# Altium PCB RobotArm_HX711_Olav_Nikolai.PcbDoc
Units mil, origin at the board's own origin, x right, y up, seen from the top; angles counter-clockwise.
Board outline 2362.2 x 1181.1 mil, 2 copper layers (Top Layer, Bottom Layer); 34 components, 56 nets, 123 pads, 12 vias.
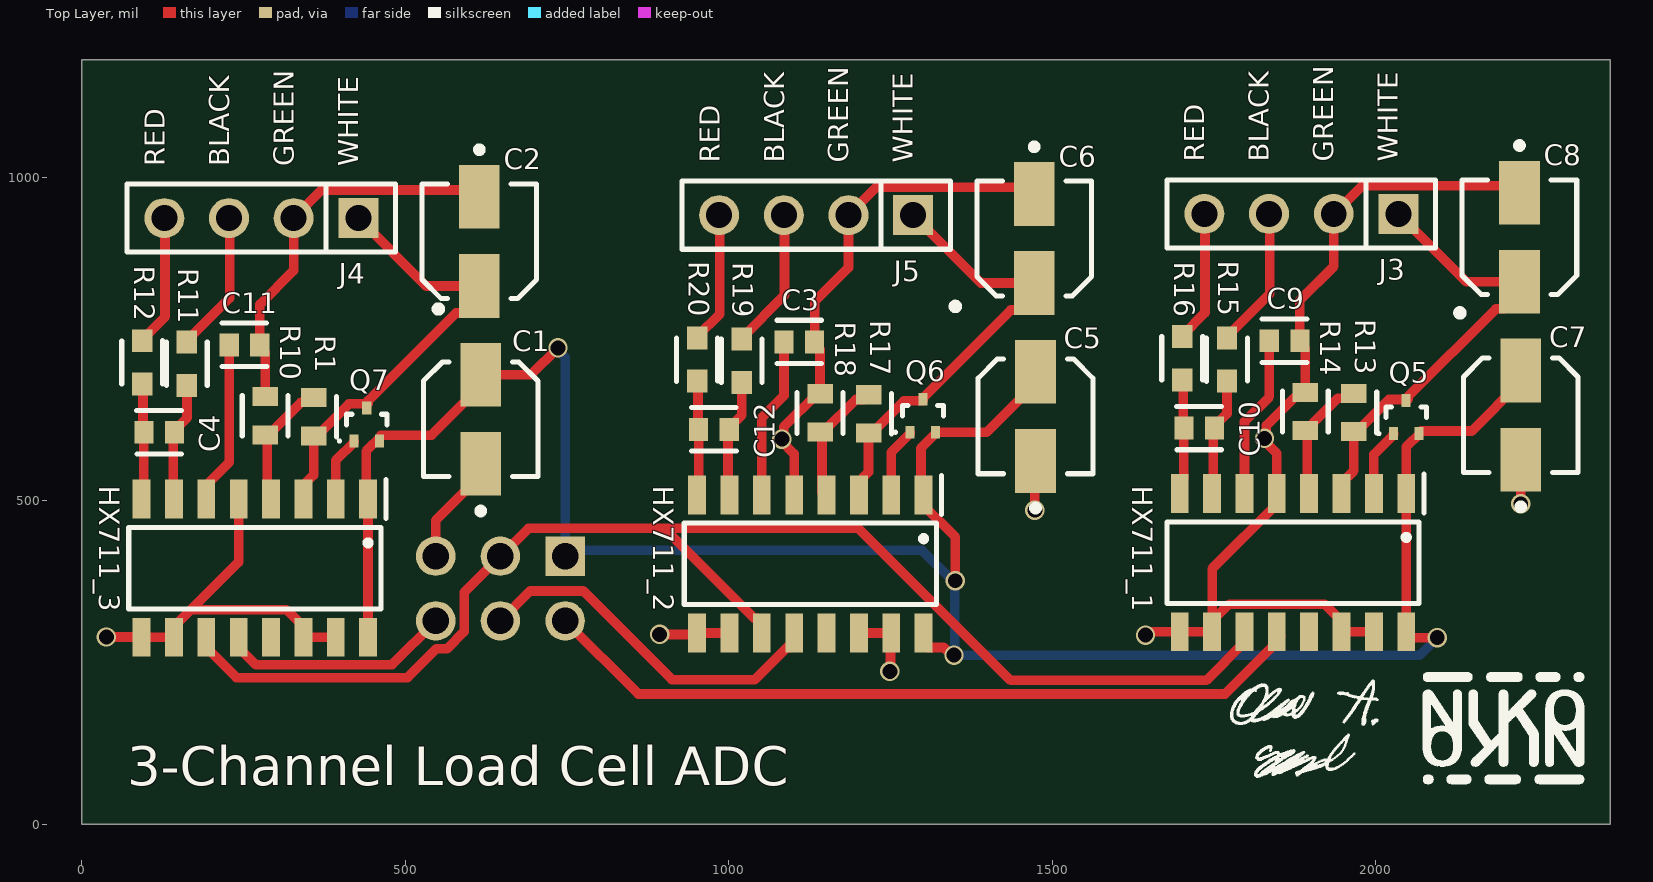
[diagram p0: Top Layer view]
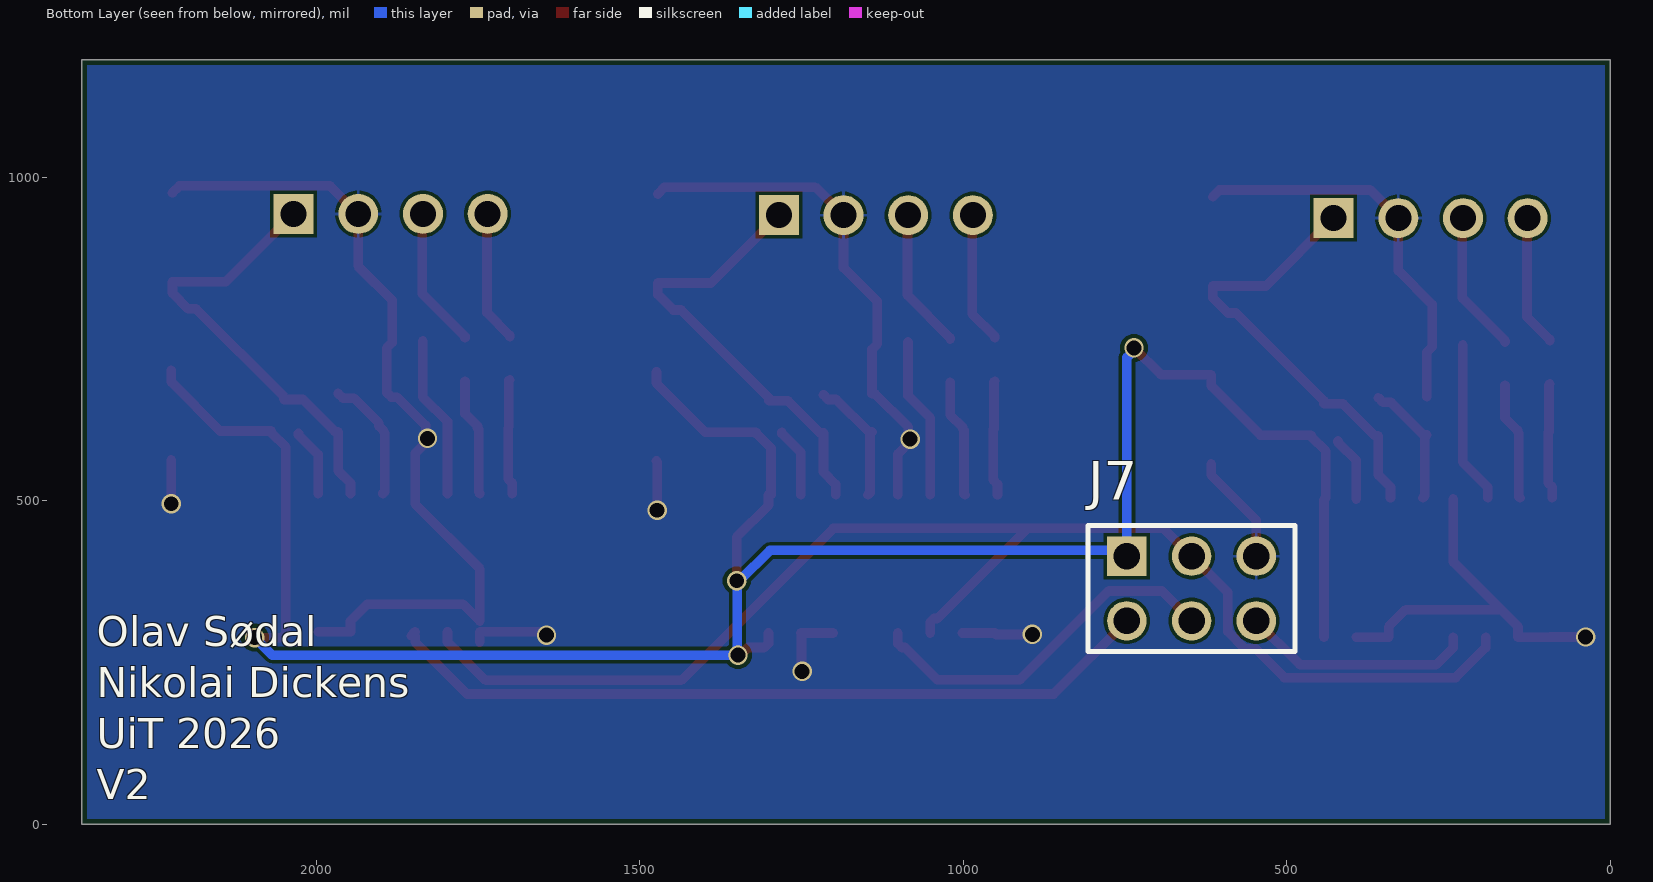
[diagram p1: Bottom Layer view, seen from below]
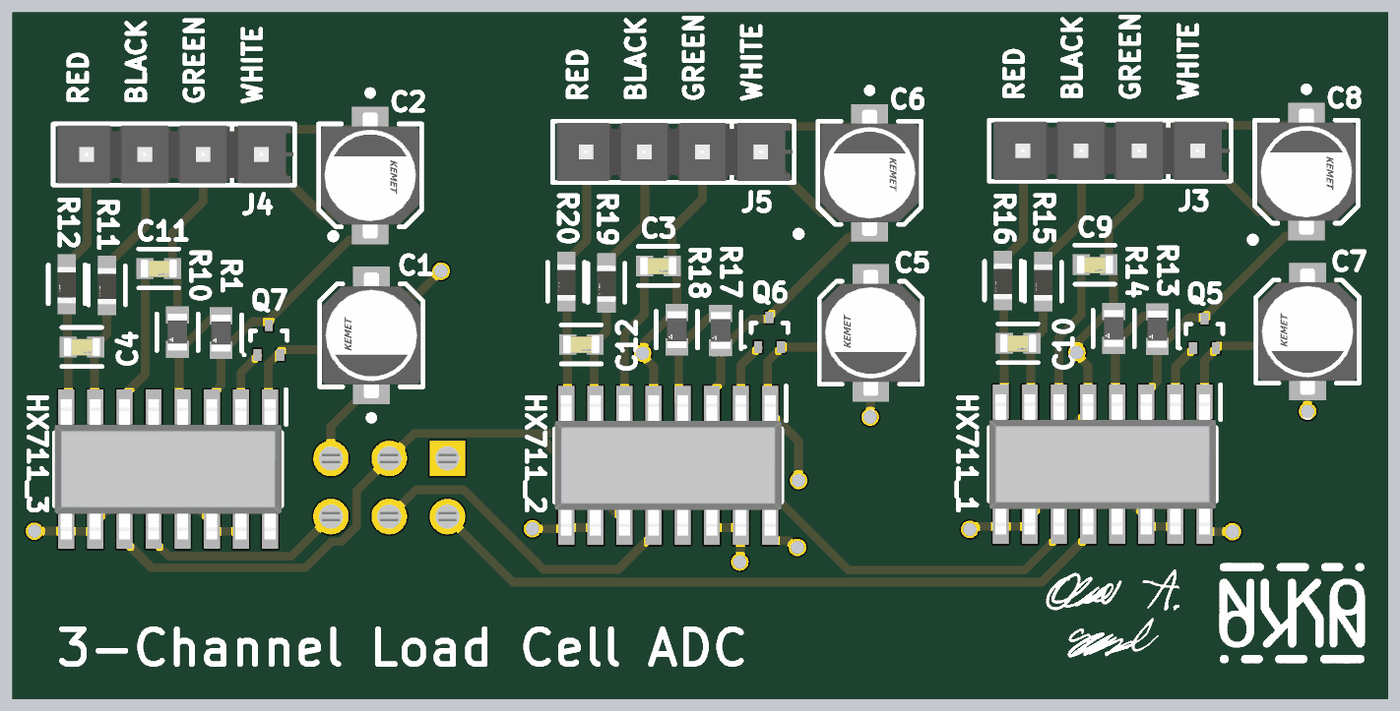
[diagram p2: 3D render of the assembled board from above, using the file's embedded part models]

## Layer stack, top to bottom
Top Solder: solder mask 0.4, Solder Resist, Dk 3.5
Top Layer: signal copper 1.4
Dielectric 1: dielectric 12.6, FR-4, Dk 4.8
Bottom Layer: signal copper 1.4
Bottom Solder: solder mask 0.4, Solder Resist, Dk 3.5

## Board outline
2362.2,0 0,0 0,1181.1 2362.2,1181.1

## Design rules (kind name [scope] priority, off if disabled: settings)
BoardOutlineClearance [All] p1: gap=7.87 ignorepadtopadclearanceinfootprint=FALSE
Clearance [All] p1: gap=5 ignorepadtopadclearanceinfootprint=FALSE except(9.84: Arc-Hole Track-Hole SMDPad-Hole THPad-Hole Via-Hole Fill-Hole Poly-Hole Region-Hole Text-Hole)
ComponentClearance [All] p1: gap=5 collisioncheckmode=3 verticalgap=5 showdistances=TRUE
DiffPairsRouting [All] p1: maxlimit=10 minlimit=5 mostfreqgap=5 toplayer_minwidth=5 toplayer_maxwidth=1000 toplayer_prefwidth=5 bottomlayer_minwidth=5 bottomlayer_maxwidth=1000 bottomlayer_prefwidth=5 maxuncoupledlength=500
Height [All] p1: minheight=0 maxheight=71497.94 prefheight=500
HoleSize [All] p1: absolutevalues=TRUE maxlimit=248.03 minlimit=11.81 maxpercent=80.000 minpercent=20.000
HoleToHoleClearance [All] p1: gap=9.84 allowstackedmicrovias=FALSE
MinimumAnnularRing [All] p1: minimumring=3
MinimumSolderMaskSliver [All] p1: minsoldermaskwidth=0
PlaneClearance [All] p1: clearance=5
PlaneConnect PlaneConnectPowerPads [InPadClass('PowerPads')] p1: planeconnectstyle=Direct reliefexpansion=20 reliefentries=4 reliefconductorwidth=10 reliefairgap=10
PlaneConnect [All] p2: pad.planeconnectstyle=Relief pad.reliefexpansion=11.81 pad.reliefentries=4 pad.reliefconductorwidth=5 pad.reliefairgap=5 via.planeconnectstyle=Direct via.reliefexpansion=11.81 via.reliefentries=4 via.reliefconductorwidth=5 via.reliefairgap=5
PolygonConnect PolygonConnectPowerPads [All vs (InPadClass('PowerPads'))] p1: connectstyle=Direct reliefconductorwidth=10 reliefentries=4 polygonreliefangle="90 Angle" airgapwidth=10
PolygonConnect [All] p2: thpad.connectstyle=Relief thpad.reliefconductorwidth=5 thpad.reliefentries=4 thpad.polygonreliefangle="90 Angle" thpad.airgapwidth=5 smdpad.connectstyle=Relief smdpad.reliefconductorwidth=5 smdpad.reliefentries=4 smdpad.polygonreliefangle="90 Angle" smdpad.airgapwidth=5 via.connectstyle=Direct via.reliefconductorwidth=5 via.reliefentries=4 via.polygonreliefangle="90 Angle" via.airgapwidth=5
RoutingVias [All] p1: holewidth=11.81 width=23.62 viastyle="Through Hole" minholewidth=11.81 minwidth=23.62 maxholewidth=23.62 maxwidth=259.84
SilkToSilkClearance [All] p1: silktosilkclearance=0
SilkToSolderMaskClearance [IsPad] p1: minsilkscreentomaskgap=5 clearancetoexposedcopper=TRUE
SolderMaskExpansion [All] p1: expansion=2.95 istentingtop=FALSE
SupplyNets "Schematic Supply Nets_2" [InNet('12V')] p1: voltage=0.000
SupplyNets "Schematic Supply Nets_1" [InNet('GND')] p2: voltage=0.000
SupplyNets "Schematic Supply Nets_4" [InNet('5V')] p3: voltage=0.000
SupplyNets "Schematic Supply Nets_3" [InNet('3V3')] p4: voltage=0.000
Width [All] p1: maxlimit=1000 minlimit=5 preferedwidth=5 minimp=50.000000 maximp=50.000000 favimp=50.000000
20 further rules are at their usual default settings.

## Classes and differential pairs
component class Main: J7
component class Designator: C1 C2 C3 C4 J4 Q6 R1 R10 R11 R12

## Components (designator, comment, footprint, x,y, rotation, side; value= is the part's Value field where it differs from the comment)
C1 "EDK106M035A9BAA" FP-EDK9B-MFG 616.37,625.54 r90 top value=10uF
C2 "EDK106M035A9BAA" FP-EDK9B-MFG 614.37,900.54 r270 top value=10uF
C3 "C0603C104K3RAC7411" FP-C0603C-CF-MFG 1109,745 r180 top value="0.10 μF"
C4 "C0603C104K3RAC7411" FP-C0603C-CF-MFG 119.37,605.54 r180 top value="0.10 μF"
C5 "EDK106M035A9BAA" FP-EDK9B-MFG 1474,630 r90 top value=10uF
C6 "EDK106M035A9BAA" FP-EDK9B-MFG 1472,905 r270 top value=10uF
C7 "EDK106M035A9BAA" FP-EDK9B-MFG 2224,632 r90 top value=10uF
C8 "EDK106M035A9BAA" FP-EDK9B-MFG 2222,907 r270 top value=10uF
C9 "C0603C104K3RAC7411" FP-C0603C-CF-MFG 1859,747 r180 top value="0.10 μF"
C10 "C0603C104K3RAC7411" FP-C0603C-CF-MFG 1727,612 r180 top value="0.10 μF"
C11 "C0603C104K3RAC7411" FP-C0603C-CF-MFG 251.37,740.54 r180 top value="0.10 μF"
C12 "C0603C104K3RAC7411" FP-C0603C-CF-MFG 977,610 r180 top value="0.10 μF"
HX711_1 "HX711" SOIC127P600X160-16N 1872,404 r270 top
HX711_2 "HX711" SOIC127P600X160-16N 1126,402 r270 top (schematic designator HC711_3)
HX711_3 "HX711" SOIC127P600X160-16N 267.37,395.54 r270 top (schematic designator HX711_2)
J3 "TSW-104-23-T-S" FP-TSW-104-23-T-S-MFG 1885,943 r180 top
J4 "TSW-104-23-T-S" FP-TSW-104-23-T-S-MFG 277.37,936.54 r180 top
J5 "TSW-104-23-T-S" FP-TSW-104-23-T-S-MFG 1135,941 r180 top
J7 "SSW-103-01-L-D" SMTC-SSW-103-01-X-D 747,414 r180 bottom
Q5 "MMBT3906TT1G" ONSC-SC-75-3-463-01_V 2047,629 r90 top
Q6 "MMBT3906TT1G" ONSC-SC-75-3-463-01_V 1300,631 r90 top
Q7 "MMBT3906TT1G" ONSC-SC-75-3-463-01_V 440.37,617.54 r90 top
R1 "CRCW060320K0FKEAHP" FP-CRCW0603-HPe3-MFG 358.37,629.54 r270 top
R10 "CRCW060320K0FKEAHP" FP-CRCW0603-HPe3-MFG 283.37,631.01 r270 top
R11 "RT0603FRE07100RL" FP-RT0603-MFG 162.37,711.54 r270 top value=100Ω
R12 "RT0603FRE07100RL" FP-RT0603-MFG 93.37,713.54 r270 top value=100Ω
R13 "CRCW060320K0FKEAHP" FP-CRCW0603-HPe3-MFG 1966,636 r270 top
R14 "CRCW060320K0FKEAHP" FP-CRCW0603-HPe3-MFG 1891,637.47 r270 top
R15 "RT0603FRE07100RL" FP-RT0603-MFG 1770,718 r270 top value=100Ω
R16 "RT0603FRE07100RL" FP-RT0603-MFG 1701,720 r270 top value=100Ω
R17 "CRCW060320K0FKEAHP" FP-CRCW0603-HPe3-MFG 1216,634 r270 top
R18 "CRCW060320K0FKEAHP" FP-CRCW0603-HPe3-MFG 1141,635.47 r270 top
R19 "RT0603FRE07100RL" FP-RT0603-MFG 1020,716 r270 top value=100Ω
R20 "RT0603FRE07100RL" FP-RT0603-MFG 951,718 r270 top value=100Ω

## Footprints (in the part's own frame and the unit in brackets; to place one, negate y for a bottom-side part, rotate by r counter-clockwise, add the part's x,y. Pads: shape width x height; smd on the part's side, far side on the other; paste and mask are expansions set on the pad)
FP-C0603C-CF-MFG [mm]
  rect 0.75x0.9 smd paste+0 mask+0: 1(-0.6,0) 2(0.6,0)
  silkscreen extent -0.87,-0.85 0.88,0.85, body extent -1.2,-0.6 1.2,0.6, height 0.25
FP-CRCW0603-HPe3-MFG [mm]
  rect 0.75x1 smd paste+0 mask+0: 1(-0.75,0) 2(0.75,0)
  silkscreen extent -0.8,0.9 0.8,0.9, body extent -1.22,-0.6 1.22,0.6, height 0.25
FP-EDK9B-MFG [mm]
  rect 2.5x1.6 smd paste+0 mask+0: 1(-1.75,0) 2(1.75,0)
  silkscreen extent -3.72,-2.25 2.25,2.25, body extent -3.25,-2.5 3.25,2.5, height 0.25
FP-RT0603-MFG [mm]
  rect 0.9x0.8 smd paste+0 mask+0: 1(-0.85,0) 2(0.85,0)
  silkscreen extent -0.85,-0.81 0.86,0.8, body extent -1.4,-0.55 1.4,0.55, height 0.25
FP-TSW-104-23-T-S-MFG [mm]
  rect 1.57x1.57 hole 1.02 paste-2539.97 mask+0: 1(-3.81,0)
  round 1.57 hole 1.02 paste-2539.97 mask+0: 2(-1.27,0) 3(1.27,0) 4(3.81,0)
  silkscreen extent -5.27,-1.34 5.27,1.34, body extent -5.37,-1.44 5.37,1.44, height 0.25
ONSC-SC-75-3-463-01_V [mil] "SOT23, 3-Leads, Body 1.6x0.8mm, Pitch 0.5mm"
  rect 20x14.02 smd: 1(-25.49,19.68) 2(-25.49,-19.69) 3(25.49,0)
  silkscreen extent -27,-31 16,44, body extent -16,-31 16,31, height 35
SMTC-SSW-103-01-X-D [mm] "SQ Post Socket, 2x3 Pins, Vertical, 2.54mm Pitch, Female"
  rect 1.55x1.55 hole 1.04: 1(0,0)
  round 1.55 hole 1.04: 2(0,-2.54) 3(2.54,0) 4(2.54,-2.54) 5(5.08,0) 6(5.08,-2.54)
  silkscreen extent -1.53,-3.74 6.61,1.2, body extent -1.52,-3.75 6.6,1.21, height 8.51
SOIC127P600X160-16N [mm]
  rect 1.525x0.7 smd: 1(-2.712,4.445) 2(-2.712,3.175) 3(-2.712,1.905) 4(-2.712,0.635) 5(-2.712,-0.635) 6(-2.712,-1.905) 7(-2.712,-3.175) 8(-2.712,-4.445) 9(2.712,-4.445) 10(2.712,-3.175) 11(2.712,-1.905) 12(2.712,-0.635) 13(2.712,0.635) 14(2.712,1.905) 15(2.712,3.175) 16(2.712,4.445)
  silkscreen extent -3.47,-4.95 1.6,5.15, body extent -3.06,-4.94 3.06,4.94, height 2.05

## Part data
C1 C2 C5 C6 C7 C8: library part CMP-03015-000003-1, "CAP ALUM 10UF 20% 35V SMD", Capacitance=10uF, Leakage Current=3.5uA, Manufacturer=Kemet, Package=EDK9B, Ripple Current=24mA, Temperature="-40°C to +85°C", Temperature Range High=+85°C, Temperature Range Low=-40°C, Tolerance=20%, Voltage Rating=35V, Automotive=No, Category=Cap, ComponentLink2Description=Datasheet, ComponentLink2URL=https://content.kemet.com/datasheets/KEM_A4001_EDK.pdf, Device Class L1="Passive Components", Device Class L2=Capacitors, Device Class L3="Aluminum Electrolytic Capacitors", Digikey Description="CAP ALUM 10UF 20% 35V SMD", Dissipation Factor=16%, Footprint Url=http://www.kemet.com/Lists/FileStore/smd_radial_ordering_codes_tech.pdf, Height=5.65mm, Lead Free=Yes, Life=2000Hours, Manufacturer Part Number=EDK106M035A9BAA, Material=Aluminum, Octopart=https://octopart.com/edk106m035a9baa-kemet-26722193, RoHS=TRUE
C3 C4 C9 C10 C11 C12: library part CMP-2006-02291-2, "CAP CER 0.1UF 25V X7R 0603", Capacitance="0.10 μF", Manufacturer=KEMET, Package=C0603C-CF, Temperature="-55°C to +125°C", Temperature Characteristic=X7R, Temperature Coefficient=30ppm/°C, Temperature Range High=+125°C, Temperature Range Low=-55°C, Tolerance=0.1, Voltage Rating="25 V", Automotive=Yes, Automotive Grade="Grade 1", Category=Cap, ComponentLink2Description=Datasheet, ComponentLink2URL=https://api.kemet.com/component-edge/download/datasheet/C0603C100J5GACAUTO.pdf, Device Class L1="Passive Components", Device Class L2=Capacitors, Device Class L3="Ceramic Capacitors", Digikey Description="CAP CER 0.1UF 25V X7R 0603", Height=0.87mm, Lead Free=Yes, Manufacturer Part Number=C0603C104K3RAC7411, Material=Ceramic, Mouser Description="Multilayer Ceramic Capacitors MLCC - SMD/SMT 25volts 0.1uF X7R 10%", Octopart=https://octopart.com/c0603c104k3rac7411-kemet-9138804, RoHS=TRUE
HX711_1 HX711_2 HX711_3: "Integrated Circuit", Manufacturer_Name=AVIA, Datasheet Link=https://cdn.sparkfun.com/datasheets/Sensors/ForceFlex/hx711_english.pdf, Height=1.6mm, Manufacturer_Part_Number=HX711
J3 J4 J5: library part CMP-02766-001388-1, "CONN HEADER VERT 4POS 2.54MM", Color=Black, Max Current Rating=7.6A, Max Operating Temperature=105°C, Max Voltage Rating (AC)=550V, Min Operating Temperature=-55°C, Package Quantity=1, Connector Type="Male Pin", Contact Material=Bronze, Contact Mating Length=0.23inch, Contact Plating=Tin, Contact Type="Male Pin", Depth=2.54mm, Gender=Male, Housing Color=Black, Housing Material=Polyester, Lead Free="Lead Free", Length=10.16mm, Mount="Through Hole", Number of Contacts=4, Number of Positions=4, Number of Rows=1, Orientation=Straight, Packaging=Bulk, Pitch=2.54mm, Radiation Hardening=No, REACH SVHC="No SVHC", RoHS Compliant=Yes, Series=TSW, Termination=Solder, Width=2.54mm
J7: library part CMP-1023-00330-1, "SQ Post Socket, Through-hole, Vertical, -55 to 125 degC, 2.54 mm Pitch, 6-Pin, Female, RoHS", Manufacturer=Samtec, Temperature Range="-55 to 125 degC", ComponentLink1Description="Manufacturer URL", ComponentLink1URL=http://www.samtec.com, ComponentLink2Description=Datasheet, ComponentLink2URL=http://www.samtec.com/documents/webfiles/pdf/SSW_TH.PDF, ComponentLink3Description="Package Specification", ComponentLink3URL=http://www.samtec.com/documents/webfiles/cpdf/SSW-1XX-XX-XXX-X-XX-XXX-XX-MKT.pdf, DatasheetVersion=F-214, Mounting Technology=Through-hole, Orientation=Vertical, PackageDescription="Assembly, Socket Strip .016 X .031 Tail", PackageReference=SSW-103-01-X-D, PackageVersion="CA, 6/1987", PartNumber=SSW-103-01-L-D, Pitch="2.54 mm", RoHS=True
Q5 Q6 Q7: library part CMP-1048-00413-1, "General Purpose Transistor, PNP Silicon, 3-Pin SC-75, Pb-Free, Tape and Reel", Manufacturer="On Semiconductor", ComponentLink1Description="Manufacturer URL", ComponentLink1URL=http://www.onsemi.com/, ComponentLink2Description=Datasheet, ComponentLink2URL=http://www.onsemi.cn/pub_link/Collateral/MMBT3906TT1-D.PDF, ComponentLink3Description="Package Specification", ComponentLink3URL=http://www.onsemi.com/pub_link/Collateral/463-01.PDF, DatasheetVersion="Rev. 1", fT Min (MHz)=250, IC Continuous (A)=-0.2, Mounting Technology="Surface Mount", PackageDescription="3-Pin Small Outline Transistor, Body 1.6 x 0.8 mm, Pitch 0.5 mm", PackageReference=SC-75-3-463-01, PackageVersion="Rev. F, 07/2005", Packing="Tape and Reel", PartNumber=MMBT3906TT1G, Polarity=PNP, RoHS=TRUE
R1 R10 R13 R14 R17 R18: library part CMP-02407-007301-1, "RES Thick Film, 20kΩ, 1%, 0.33W, 100ppm/°C, 0603", Case Code (Imperial)=0603, Case Code (Metric)=1608, Max Operating Temperature=155°C, Max Power Dissipation=250mW, Min Operating Temperature=-55°C, Package Quantity=10, Resistance=20kR, Temperature Coefficient=100ppm/°C, Tolerance=1%, Voltage Rating=75V, Case/Package=0603, Composition="Thick Film", Contact Plating=Tin, Depth=0.85mm, Features="Automotive AEC-Q200", Height=0.45mm, Lead Free="Lead Free", Length=1.6mm, Mount="Surface Mount", Number of Terminations=2, Packaging="Tape and Reel", Power Rating=250mW, Radiation Hardening=No, Termination=SMD/SMT, Weight=7.1E-05oz, Width=0.033inch
R11 R12 R15 R16 R19 R20: library part CMP-03412-022806-1, "RES SMD 100 OHM 1% 1/10W 0603", Manufacturer=Yageo, Package=RT0603, Power Rating=0.1W, Resistance=100Ω, Temperature="-55°C to +155°C", Temperature Coefficient="50 ppm/°C", Temperature Range High=+155°C, Temperature Range Low=-55°C, Tolerance=0.01, Voltage Rating=75V, Automotive=No, Category=Res, ComponentLink2Description=Datasheet, ComponentLink2URL=http://www.yageo.com/documents/recent/PYu-RT_1-to-0.01_RoHS_L_9.pdf, Composition="Thin Film", Device Class L1="Passive Components", Device Class L2=Resistors, Device Class L3="Chip SMD Resistors", Digikey Description="RES SMD 100 OHM 1% 1/10W 0603", Footprint Url=http://www.yageo.com/exep/pages/download/literatures/PYu-R_Mount_10.pdf, Height=0.55mm, Ipc Land Pattern Name=RESC16080X45, Lead Free=Yes, Manufacturer Part Number=RT0603FRE07100RL, Mouser Description="Thin Film Resistors - SMD 1/10W 100 ohm 1% 50ppm", Octopart=https://octopart.com/rt0603fre07100rl-yageo-39792638, RoHS=TRUE, Series=RT

## Via types
v1: diameter 30, hole 23, Top Layer to Bottom Layer, 12 vias

## Nets (pads, with @x,y where several pads share a name; then routed paths per layer and width w, separated by ;. In a path a pad name is that pad's centre, name@x,y a point inside that pad or via, vN(x,y) a via of type N, cw(c..) or ccw(c..) an arc to the next point about the centre after c; other vN are vias at no path point)
3V3: C1.2 C5.2 C7.2 HX711_1.1 HX711_1.16 HX711_2.1 HX711_2.16 HX711_3.1 HX711_3.16 J7.1 Q5.2 Q6.2 Q7.2 | length 3593.8
  Top Layer w15: HX711_3.16 442.37,501.31 439.37,504.31 439.37,576.35 Q7.2@462.05,599.04 ; Q7.2@462.05,601.04 540.69,601.04 616.37,676.72 C1.2 694.43,694.43 v1(736,736) ; HX711_2.1@1297,508.77 1297,580.81 Q6.2@1319.69,603.5 ; HX711_2.16 1301,278.99 1307.28,272.71 1332.23,272.71 1343.94,261 v1(1348,261) ; HX711_2.1 1301,492.53 1350,443.53 v1(1350,376) ; Q6.2 1398.33,605.51 1474,681.18 C5.2 ; Q5.2@2069.69,605.5 2047,582.81 HX711_1.1 HX711_1.16 2047,294.28 2053.28,288 v1(2095,288) ; Q5.2@2069.69,607.51 2148.33,607.51 2224,683.18 C7.2
  Bottom Layer w15: v1(736,736) 736,731.94 747,720.94 J7.1 756,423 1298.94,423 1345.94,376 v1(1350,376) 1349,375 1349,262 v1(1348,261) 2068,261 v1(2095,288)
5V: 
12V: 
CLK: 
GND: C1.1 C2.1 C3.1 C5.1 C6.1 C7.1 C8.1 C9.1 C11.1 HX711_1.5 HX711_1.9 HX711_1.10 HX711_1.14 HX711_1.15 HX711_2.5 HX711_2.9 HX711_2.10 HX711_2.14 HX711_2.15 HX711_3.5 HX711_3.9 HX711_3.10 HX711_3.14 HX711_3.15 J3.2 J4.2 J5.2 J7.5 R10.1 R14.1 R18.1 | length 4011.8
  Top Layer w15: v1(38,289) 92.13,289 HX711_3.9 HX711_3.10 142.37,305 168.65,331.28 ; HX711_3.5 242.37,405 168.65,331.28 ; R10.1 283.37,729.2 274.99,737.58 C11.1 274.99,803.16 327.37,855.54 J4.2 370.77,979.94 603.86,979.94 C2.1 ; HX711_3.15 HX711_3.14 342.37,305 316.09,331.28 168.65,331.28 ; J7.5 547,469.55 616.37,538.92 C1.1 ; v1(893,293) 948.77,293 HX711_2.9 HX711_2.10 ; HX711_2.5 1101,571.94 1082,590.94 v1(1082,595) 1084.87,597.87 1084.87,613.79 1136.08,665 R18.1 1141,733.67 1132.62,742.05 C3.1 1132.62,807.62 1185,860 J5.2 1228.41,984.41 1461.49,984.41 C6.1 ; HX711_2.14 HX711_2.15 1250,294.23 1250,237 v1(1249,236) ; v1(1473,485) 1473,560.1 C5.1 ; v1(1644,292) 1648.06,292 1653.29,297.23 HX711_1.9 HX711_1.10 HX711_1.10@1747,280.99 ; HX711_1.15 HX711_1.14 1947,313.47 1920.72,339.75 1773.28,339.75 1747,313.47 1747,394.53 1847,494.53 1847,572.94 1828,591.94 v1(1828,596) 1830.87,598.87 1830.87,615.87 1874.74,659.74 1883.74,659.74 R14.1 1891,735.67 1882.62,744.05 C9.1 1882.62,809.62 1935,862 J3.2 1978.41,986.41 2211.49,986.41 C8.1 ; v1(2224,495) C7.1
"Green (S+)_1": J3.3 R15.1 | length 218.9
  Top Layer w15: R15.1 1770,753.43 1836,819.43 J3.3@1836,943
"Green (S+)_2": J4.3 R11.1 | length 218.9
  Top Layer w15: R11.1 162.37,746.97 228.37,812.97 J4.3@228.37,936.54
"Green (S+)_3": J5.3 R19.1 | length 218.9
  Top Layer w15: R19.1 1020,751.43 1086,817.43 J5.3@1086,941
HX711_1: HX711_1.12 J7.2 | length 1198.8
  Top Layer w15: J7.2 860,201 1767.01,201 1847,280.99 HX711_1.12@1847,290.95 ; HX711_1.12 HX711_1.12@1853.28,290.95
HX711_2: HX711_2.12 J7.4 | length 569.2
  Top Layer w15: J7.4 693,360 775,360 912,223 1040.25,223 1089.96,272.71 1094.72,272.71 1101,278.99 HX711_2.12
HX711_3: HX711_3.12 J7.6 | length 359.8
  Top Layer w15: HX711_3.12 242.37,272.52 268.65,246.24 479.24,246.24 J7.6
Knapp_1: 
Knapp_2: 
Knapp_3: 
NetC4_1: C4.1 HX711_3.7 R11.2 | length 180.3
  Top Layer w15: HX711_3.7@139.37,504.31 141.18,506.12 141.18,603.72 C4.1 ; C4.1@142.99,608.49 162.37,627.87 R11.2
NetC4_2: C4.2 HX711_3.8 R12.2 | length 179.4
  Top Layer w15: HX711_3.8@89.37,504.31 89.37,520.55 95.74,526.93 C4.2 94.56,606.72 94.56,678.88 R12.2
NetC10_1: C10.1 HX711_1.7 R15.2 | length 180.3
  Top Layer w15: HX711_1.7 1748.81,512.58 1748.81,610.19 C10.1 ; C10.1@1750.62,614.95 1770,634.33 R15.2
NetC10_2: C10.2 HX711_1.8 R16.2 | length 179.4
  Top Layer w15: HX711_1.8 1697,527.01 1703.38,533.39 C10.2 1702.19,613.19 1702.19,685.35 R16.2
NetC12_1: C12.1 HX711_2.7 R19.2 | length 180.3
  Top Layer w15: HX711_2.7@997,508.77 998.81,510.58 998.81,608.19 C12.1 ; C12.1@1000.62,612.95 1020,632.33 R19.2
NetC12_2: C12.2 HX711_2.8 R20.2 | length 179.4
  Top Layer w15: HX711_2.8@947,508.77 947,525.01 953.38,531.39 C12.2 952.19,611.19 952.19,683.35 R20.2
NetD2_1: 
NetD3_1: 
NetJ6_3: 
NetP1_3: 
NetP2_3: 
NetP3_3: 
NetP4_3: 
NetQ2_1: 
NetQ3_1: 
NetQ4_1: 
NetQ5_1: HX711_1.2 Q5.1 | length 105.3
  Top Layer w15: HX711_1.2 1997,571.18 2027.32,601.5 Q5.1
NetQ6_1: HX711_2.2 Q6.1 | length 108.9
  Top Layer w15: HX711_2.2 1251,574.18 1280.32,603.5 Q6.1
NetQ7_1: HX711_3.2 Q7.1 | length 101.5
  Top Layer w15: HX711_3.2 392.37,561.72 420.68,590.04 Q7.1
NetQ8_1: 
NetQ9_1: 
NetR1_1: HX711_3.4 R1.1 R10.2 | length 198.5
  Top Layer w15: HX711_3.4@289.37,504.31 286.37,507.31 286.37,598.48 R10.2 288.29,601.48 338.61,651.8 351.1,651.8 R1.1
NetR10_1: C3.2 HX711_2.6 | length 250.5
  Top Layer w15: HX711_2.6 1051,628 1085.38,662.38 C3.2
NetR13_1: HX711_1.4 R13.1 R14.2 | length 192.2
  Top Layer w15: R14.2@1894,604.94 1894,513.77 HX711_1.4 ; R14.2@1895.92,607.94 1903.19,615.21 1903.19,620.13 1941.32,658.26 1958.74,658.26 R13.1
NetR14_1: C9.2 HX711_1.6 | length 252.1
  Top Layer w15: HX711_1.6 1797,622 1835.38,660.38 C9.2
NetR17_1: HX711_2.4 R17.1 R18.2 | length 198.5
  Top Layer w15: HX711_2.4@1147,508.77 1144,511.77 1144,602.94 R18.2 1145.92,605.94 1196.24,656.26 1208.74,656.26 R17.1
NetR18_1: C11.2 HX711_3.6 | length 252.1
  Top Layer w15: HX711_3.6@189.37,504.31 189.37,520.55 227.74,558.93 C11.2
PD_SCK: HX711_1.11 HX711_2.11 HX711_3.11 J7.3 | length 2136.1
  Top Layer w15: HX711_3.11 192.37,272.52 238.65,226.24 503.24,226.24 547.99,270.99 564.82,270.99 591,297.17 591,358 J7.3 690.01,457.01 900.69,457.01 ; HX711_2.11 1051,311.47 1044.72,317.75 1039.96,317.75 900.69,457.01 ; HX711_1.11 1797,280.99 1738.01,222 1435.71,222 1200.69,457.01 900.69,457.01
"Pump -": 
PWM_0: 
PWM_1: 
PWM_2: 
PWM_3: 
PWM_4: 
"RED (E+)_1": C8.2 HX711_1.3 J3.1 Q5.3 R13.2 | length 698.7
  Top Layer w15: HX711_1.3 1947,527.01 1966,546.01 R13.2 1970.92,606.47 2020.44,655.99 2049.51,655.99 2050,656.48 2050,658.49 2050,660.5 2185.89,796.39 2198,796.39 2222,820.39 C8.2 2139.9,838.1 J3.1
"RED (E+)_2": C6.2 HX711_2.3 J5.1 Q6.3 R17.2 | length 698.7
  Top Layer w15: HX711_2.3@1197,508.77 1197,525.01 1216,544.01 R17.2 1220.92,604.47 1270.44,653.99 1299.51,653.99 1300,654.48 Q6.3 1300,658.5 1435.89,794.39 1448,794.39 1472,818.39 C6.2 1389.9,836.1 J5.1
"RED (E+)_3": C2.2 HX711_3.3 J4.1 Q7.3 R1.2 | length 698.7
  Top Layer w15: HX711_3.3@339.37,504.31 339.37,520.55 358.37,539.55 R1.2 363.29,600.01 412.81,649.53 441.87,649.53 442.37,650.02 442.37,652.03 442.37,654.04 578.26,789.93 590.37,789.93 614.37,813.92 C2.2 532.26,831.64 J4.1
SCL: 
SDA: 
"White (S-)_1": J3.4 R16.1 | length 204
  Top Layer w15: R16.1 1701,755.43 1736,790.43 J3.4@1736,943
"White (S-)_2": J4.4 R12.1 | length 204
  Top Layer w15: R12.1 93.37,748.97 128.37,783.97 J4.4@128.37,936.54
"White (S-)_3": J5.4 R20.1 | length 204
  Top Layer w15: R20.1 951,753.43 986,788.43 J5.4@986,941
pads on no net: HX711_1.13 HX711_2.13 HX711_3.13

## Polygon pours and split planes (outlines as drawn)
GND on Bottom Layer "GND_L02_P000" (solid, pour order 0): 0,0 0,1181.1 2362.2,1181.1 2362.2,0

## Silkscreen, mask and mechanical layers (free items; w line width, h text height)
Top Overlay:
  drawing of 21 lines, arcs and shapes, not listed
  text "RED" at 1735.11,1023.44 h31 r90
  text "BLACK" at 1834.78,1023.44 h31 r90
  text "GREEN" at 1934.44,1023.44 h31 r90
  text "WHITE" at 2034.11,1023.44 h31 r90
  text "RED" at 985.62,1021.8 h31 r90
  text "BLACK" at 1085.29,1021.8 h31 r90
  text "GREEN" at 1184.95,1021.8 h31 r90
  text "WHITE" at 1284.62,1021.8 h31 r90
  text "RED" at 128,1017.02 h31 r90
  text "BLACK" at 227.67,1017.02 h31 r90
  text "GREEN" at 327.33,1017.02 h31 r90
  text "WHITE" at 427,1017.02 h31 r90
  text "3-Channel Load Cell ADC" at 70,60 h60
Bottom Overlay:
  text "Olav Sødal / Nikolai Dickens / UiT 2026 / V2" at 2339,23 h78.74